# Altium PCB motor_driver.PcbDoc
Units mm, origin at the board's own origin, x right, y up, seen from the top; angles counter-clockwise.
Board outline 28.18 x 14.1 mm, 2 copper layers (Top Layer, Bottom Layer); 20 components, 20 nets, 68 pads, 0 vias.
Unrouted connection lines stored in the file: 44.
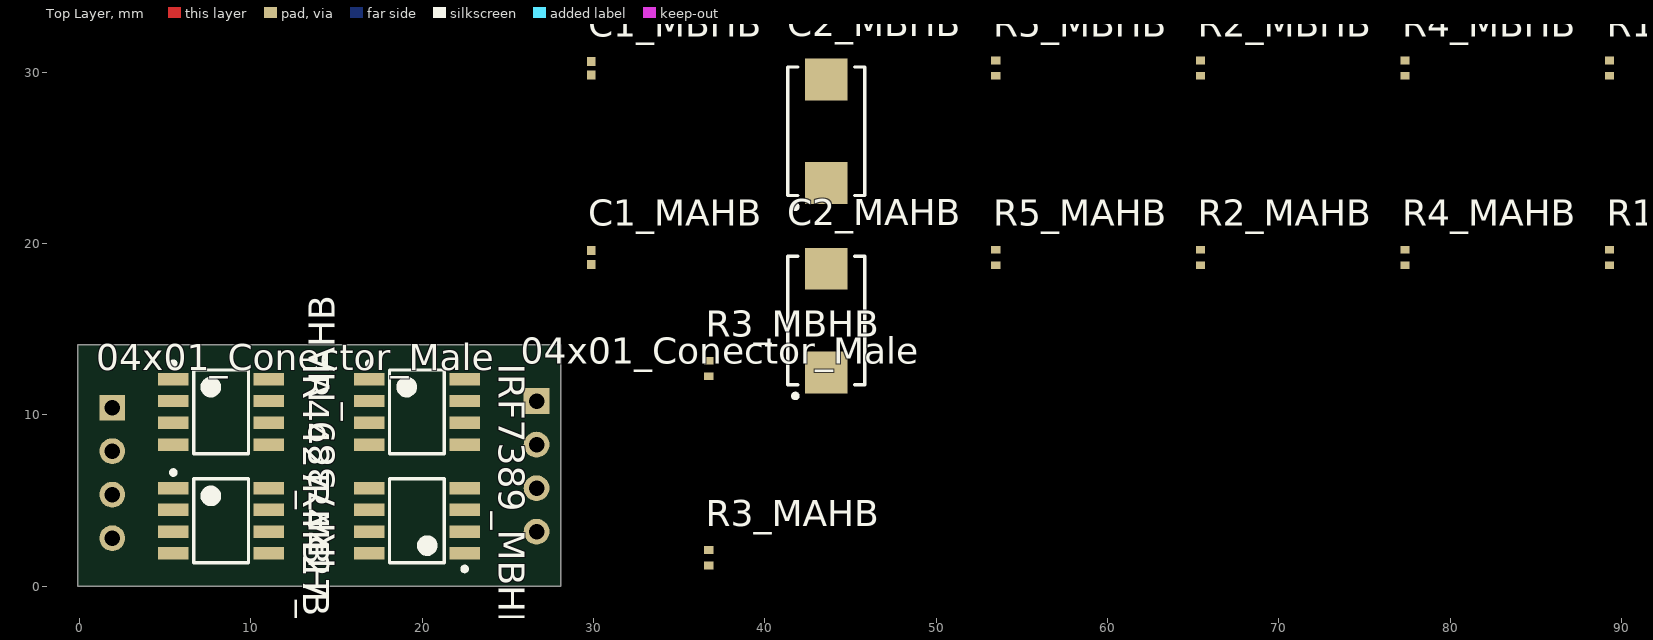
[diagram p0: Top Layer view]
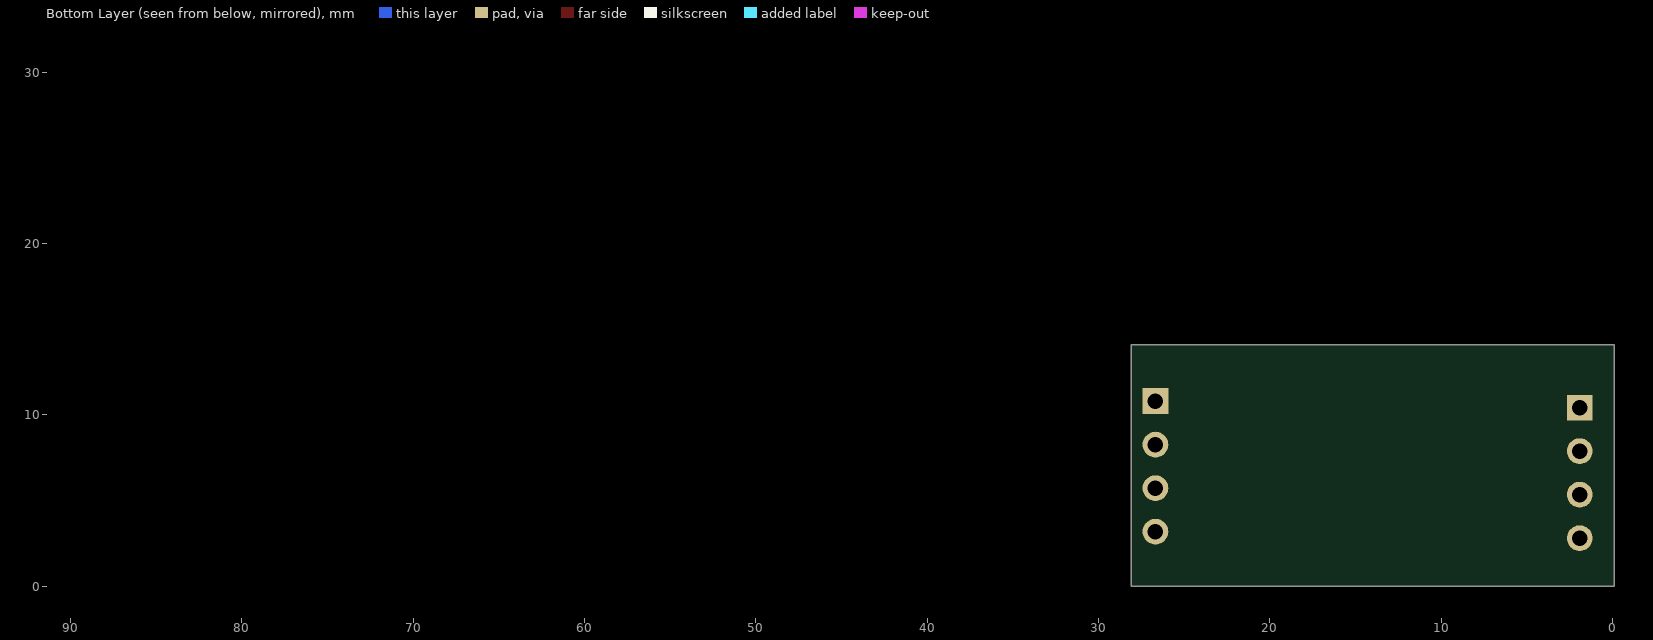
[diagram p1: Bottom Layer view, seen from below]

## Layer stack, top to bottom
Top Solder: solder mask 0.0102, Solder Resist, Dk 3.5
Top Layer: signal copper 0.0356
Dielectric 1: dielectric 0.32, FR-4, Dk 4.8
Bottom Layer: signal copper 0.0356
Bottom Solder: solder mask 0.0102, Solder Resist, Dk 3.5

## Board outline
-0.111,0 28.067,0 28.067,14.097 -0.111,14.097

## Design rules (kind name [scope] priority, off if disabled: settings)
Clearance Clearance_1 [InNamedPolygon('VCC_L02_P075')] p1: gap=0.16
Clearance [All] p2: gap=0.2
PlaneConnect [All] p1: planeconnectstyle=Relief reliefexpansion=0.508 reliefentries=4 reliefconductorwidth=0.5 reliefairgap=0.254
PolygonConnect "Schematic Polygon Connect Style_9" [InNet('MA_MBHB')] p1: connectstyle=Direct reliefconductorwidth=0.254 reliefentries=4 polygonreliefangle="45 Angle" airgapwidth=0.254
PolygonConnect "Schematic Polygon Connect Style_8" [InNet('MA')] p2: connectstyle=Direct reliefconductorwidth=0.254 reliefentries=4 polygonreliefangle="45 Angle" airgapwidth=0.254
PolygonConnect "Schematic Polygon Connect Style_7" [InComponent('C2_MAHB')] p3: connectstyle=Direct reliefconductorwidth=0.254 reliefentries=4 polygonreliefangle="45 Angle" airgapwidth=0.254
PolygonConnect "Schematic Polygon Connect Style" [InComponent('C2_MBHB')] p4: connectstyle=Direct reliefconductorwidth=0.254 reliefentries=4 polygonreliefangle="45 Angle" airgapwidth=0.254
PolygonConnect PolygonConnect_2 [IsThruPin] p5: connectstyle=Direct reliefconductorwidth=0.5 reliefentries=4 polygonreliefangle="90 Angle" airgapwidth=0.254
PolygonConnect "Schematic Polygon Connect Style_6" [InNet('NetIC2_2')] p6: connectstyle=Direct reliefconductorwidth=0.254 reliefentries=4 polygonreliefangle="45 Angle" airgapwidth=0.254
PolygonConnect "Schematic Polygon Connect Style_5" [InNet('NetIC2_4')] p7: connectstyle=Direct reliefconductorwidth=0.254 reliefentries=4 polygonreliefangle="45 Angle" airgapwidth=0.254
PolygonConnect "Schematic Polygon Connect Style_4" [InNet('NetIC4_2')] p8: connectstyle=Direct reliefconductorwidth=0.254 reliefentries=4 polygonreliefangle="45 Angle" airgapwidth=0.254
PolygonConnect "Schematic Polygon Connect Style_3" [InNet('NetIC4_4')] p9: connectstyle=Direct reliefconductorwidth=0.254 reliefentries=4 polygonreliefangle="45 Angle" airgapwidth=0.254
PolygonConnect "Schematic Polygon Connect Style_2" [InNet('NetIC4_5')] p10: connectstyle=Direct reliefconductorwidth=0.254 reliefentries=4 polygonreliefangle="45 Angle" airgapwidth=0.254
PolygonConnect "Schematic Polygon Connect Style_1" [InNet('MA')] p11: connectstyle=Direct reliefconductorwidth=0.254 reliefentries=4 polygonreliefangle="45 Angle" airgapwidth=0.254
PolygonConnect PolygonConnect_1 [InNet('VCC')] p12: connectstyle=Direct reliefconductorwidth=0.5 reliefentries=4 polygonreliefangle="90 Angle" airgapwidth=0.254
PolygonConnect [All] p13: connectstyle=Relief reliefconductorwidth=0.254 reliefentries=4 polygonreliefangle="90 Angle" airgapwidth=0.254
RoutingVias [All] p1: holewidth=0.3 width=0.6 viastyle="Through Hole" minholewidth=0.2 minwidth=0.5 maxholewidth=0.4 maxwidth=1.27
SolderMaskExpansion [All] p1: expansion=0.102
Width [All] p1: maxlimit=1 minlimit=0.254 preferedwidth=0.254
29 further rules are at their usual default settings.

## Classes and differential pairs
channel class half_bridge: MAHB MBHB
component class MBHB: C1_MBHB C2_MBHB IR4427_MBHB IRF7389_MBHB R1_MBHB R2_MBHB R3_MBHB R4_MBHB R5_MBHB
component class MAHB: C1_MAHB C2_MAHB IR4427_MAHB IRF7389_MAHB R1_MAHB R2_MAHB R3_MAHB R4_MAHB R5_MAHB
component class motor_driver: 04x01_Conector_Male R4 R5

## Components (designator, comment, footprint, x,y, rotation, side; value= is the part's Value field where it differs from the comment)
04x01_Conector_Male "22032041" 04x01_Conector_Male 26.67,6.985 r90 top
04x01_Conector_Male "22032041" 04x01_Conector_Male 1.905,6.604 r90 top
C1_MAHB "100pF" 0402-CAP 29.861,19.177 r90 top (schematic designator C1)
C1_MBHB "100pF" 0402-CAP 29.861,30.226 r90 top (schematic designator C1)
C2_MAHB "4,7UF" PCBComponent 43.577,15.494 r90 top (schematic designator C2)
C2_MBHB "4,7UF" PCBComponent 43.577,26.543 r90 top (schematic designator C2)
IR4427_MAHB "IR4427STRPBF" IR4427-PCB 8.255,3.81 r0 top (schematic designator IR4427)
IR4427_MBHB "IR4427STRPBF" IR4427-PCB 8.255,10.16 r0 top (schematic designator IR4427)
IRF7389_MAHB "IRF7389TRPBF" IRF7389-PCB 19.685,3.81 r180 top (schematic designator IRF7389)
IRF7389_MBHB "IRF7389TRPBF" IRF7389-PCB 19.685,10.16 r0 top (schematic designator IRF7389)
R1_MAHB "330R" 0402-RES-HD 89.297,19.177 r90 top (schematic designator R1)
R1_MBHB "330R" 0402-RES-HD 89.297,30.226 r90 top (schematic designator R1)
R2_MAHB "330R" 0402-RES-HD 65.421,19.177 r90 top (schematic designator R2)
R2_MBHB "330R" 0402-RES-HD 65.421,30.226 r90 top (schematic designator R2)
R3_MAHB "10K" 0402-RES-HD 36.719,1.651 r90 top (schematic designator R3)
R3_MBHB "10K" 0402-RES-HD 36.719,12.7 r90 top (schematic designator R3)
R4_MAHB "10R" 0402-RES-HD 77.359,19.177 r90 top (schematic designator R4)
R4_MBHB "10R" 0402-RES-HD 77.359,30.226 r90 top (schematic designator R4)
R5_MAHB "10R" 0402-RES-HD 53.483,19.177 r90 top (schematic designator R5)
R5_MBHB "10R" 0402-RES-HD 53.483,30.226 r90 top (schematic designator R5)

## Footprints (in the part's own frame and the unit in brackets; to place one, negate y for a bottom-side part, rotate by r counter-clockwise, add the part's x,y. Pads: shape width x height; smd on the part's side, far side on the other; paste and mask are expansions set on the pad)
04x01_Conector_Male [mm] "0022032041"
  round 1.5 hole 0.9: 0(-3.81,0) 1(-1.27,0) 2(1.27,0)
  rect 1.5x1.5 hole 0.9: 3(3.81,0)
  body extent -4.95,-1.18 4.95,1.18, height 10.84
0402-CAP [mm] "Chip Capacitor, Body 1.0x0.5mm, Height 0.6mm, IPC Medium Density"
  rect 0.52x0.52 smd: 1(-0.4,0) 2(0.4,0)
  body extent -0.55,-0.3 0.55,0.3, height 0.33
0402-RES-HD [mm] "Chip Resistor, Body 1.0x0.5mm, IPC High Density"
  rect 0.45x0.55 smd: 1(-0.45,0) 2(0.45,0)
  body extent -0.52,-0.27 0.53,0.28, height 0.4
IR4427-PCB [mm] "SOIC, 8-Leads, Body 4,85x3,90mm, Pitch 1,27mm, IPC Medium Density"
  rect 1.78x0.72 smd: 1(-2.785,1.905) 2(-2.785,0.635) 3(-2.785,-0.635) 4(-2.785,-1.905) 5(2.785,-1.905) 6(2.785,-0.635) 7(2.785,0.635) 8(2.785,1.905)
  silkscreen extent -2.91,-2.45 1.6,2.94, body extent -2,-2.45 2,2.45, height 1.75
IRF7389-PCB [mm] "SOIC, 8-Leads, Body 4,85x3,90mm, Pitch 1,27mm, IPC Medium Density"
  rect 1.78x0.72 smd: 1(-2.785,1.905) 2(-2.785,0.635) 3(-2.785,-0.635) 4(-2.785,-1.905) 5(2.785,-1.905) 6(2.785,-0.635) 7(2.785,0.635) 8(2.785,1.905)
  silkscreen extent -2.91,-2.45 1.6,2.94, body extent -2,-2.45 2,2.45, height 1.75
PCBComponent [mm]
  rect 2.45x2.5 smd: 1(-3.025,0) 2(3.025,0)
  silkscreen extent -4.52,-2.25 3.75,2.25, body extent -3.75,-2.25 3.75,2.25, height 2.9

## Part data
04x01_Conector_Male 04x01_Conector_Male: library part 04x01_Conector_Male-SCH, "CONN HEADER 4POS .100 VERT TIN"
C1_MAHB C1_MBHB: library part CC0402-100pF-A.2, "CAP CER 100PF 50V 1% NP0 0402"
C2_MAHB C2_MBHB: library part TPSD106K035R0300-01.A.1, "Tantalum Capacitors - Solid SMD 10uF 35V 10% L ESR"
IR4427_MAHB IR4427_MBHB: library part IR4427, "IC DRIVER DUAL LOW SIDE 8-DIP"
IRF7389_MAHB IRF7389_MBHB: library part IRF7389, "MOSFET N/P-CH 30V 8-SOIC"
R1_MAHB R1_MBHB R2_MAHB R2_MBHB: library part R0402-330R-7, "RES 330 OHM 1/10W 1% 0402 SMD"
R3_MAHB R3_MBHB: library part R0402-10K-10, "RES 10K OHM 1/10W 1% 0402 SMD"
R4_MAHB R4_MBHB R5_MAHB R5_MBHB: library part R0402-10R-6, "RES 10 OHM 1/10W 1% 0402 SMD"

## Nets (pads, with @x,y where several pads share a name; then routed paths per layer and width w, separated by ;. In a path a pad name is that pad's centre, name@x,y a point inside that pad or via, vN(x,y) a via of type N, cw(c..) or ccw(c..) an arc to the next point about the centre after c; other vN are vias at no path point)
GND: 04x01_Conector_Male.0@26.67,3.175 C1_MAHB.2 C1_MBHB.2 C2_MAHB.2 C2_MBHB.2 IR4427_MAHB.3 IR4427_MBHB.3 IRF7389_MAHB.1 IRF7389_MBHB.1 R3_MAHB.1 R3_MBHB.1
MA: 04x01_Conector_Male.3@26.67,10.795 IRF7389_MAHB.5 IRF7389_MAHB.6 IRF7389_MAHB.7 IRF7389_MAHB.8
MA_MBHB: 04x01_Conector_Male.2@26.67,8.255 IRF7389_MBHB.5 IRF7389_MBHB.6 IRF7389_MBHB.7 IRF7389_MBHB.8
MAH: 04x01_Conector_Male.0@1.905,2.794 R2_MAHB.1
MAL: 04x01_Conector_Male.1@1.905,5.334 R1_MAHB.1
MBH: 04x01_Conector_Male.2@1.905,7.874 R2_MBHB.1
MBL: 04x01_Conector_Male.3@1.905,10.414 R1_MBHB.1
NetIR4427_MAHB_2: IR4427_MAHB.2 R1_MAHB.2 R3_MAHB.2
NetIR4427_MAHB_4: IR4427_MAHB.4 R2_MAHB.2
NetIR4427_MAHB_5: IR4427_MAHB.5 R5_MAHB.1
NetIR4427_MAHB_7: IR4427_MAHB.7 R4_MAHB.1
NetIR4427_MBHB_2: IR4427_MBHB.2 R1_MBHB.2 R3_MBHB.2
NetIR4427_MBHB_4: IR4427_MBHB.4 R2_MBHB.2
NetIR4427_MBHB_5: IR4427_MBHB.5 R5_MBHB.1
NetIR4427_MBHB_7: IR4427_MBHB.7 R4_MBHB.1
NetIRF7389_MAHB_2: IRF7389_MAHB.2 R4_MAHB.2
NetIRF7389_MAHB_4: IRF7389_MAHB.4 R5_MAHB.2
NetIRF7389_MBHB_2: IRF7389_MBHB.2 R4_MBHB.2
NetIRF7389_MBHB_4: IRF7389_MBHB.4 R5_MBHB.2
VCC: 04x01_Conector_Male.1@26.67,5.715 C1_MAHB.1 C1_MBHB.1 C2_MAHB.1 C2_MBHB.1 IR4427_MAHB.6 IR4427_MBHB.6 IRF7389_MAHB.3 IRF7389_MBHB.3
pads on no net: IR4427_MAHB.1 IR4427_MAHB.8 IR4427_MBHB.1 IR4427_MBHB.8